# Altium PCB Pill_STM32F405.PcbDoc
Units mm, origin at the board's own origin, x right, y up, seen from the top; angles counter-clockwise.
Board outline 74.93 x 25.4 mm, 2 copper layers (Top, Bottom); 35 components, 63 nets, 202 pads, 140 vias.
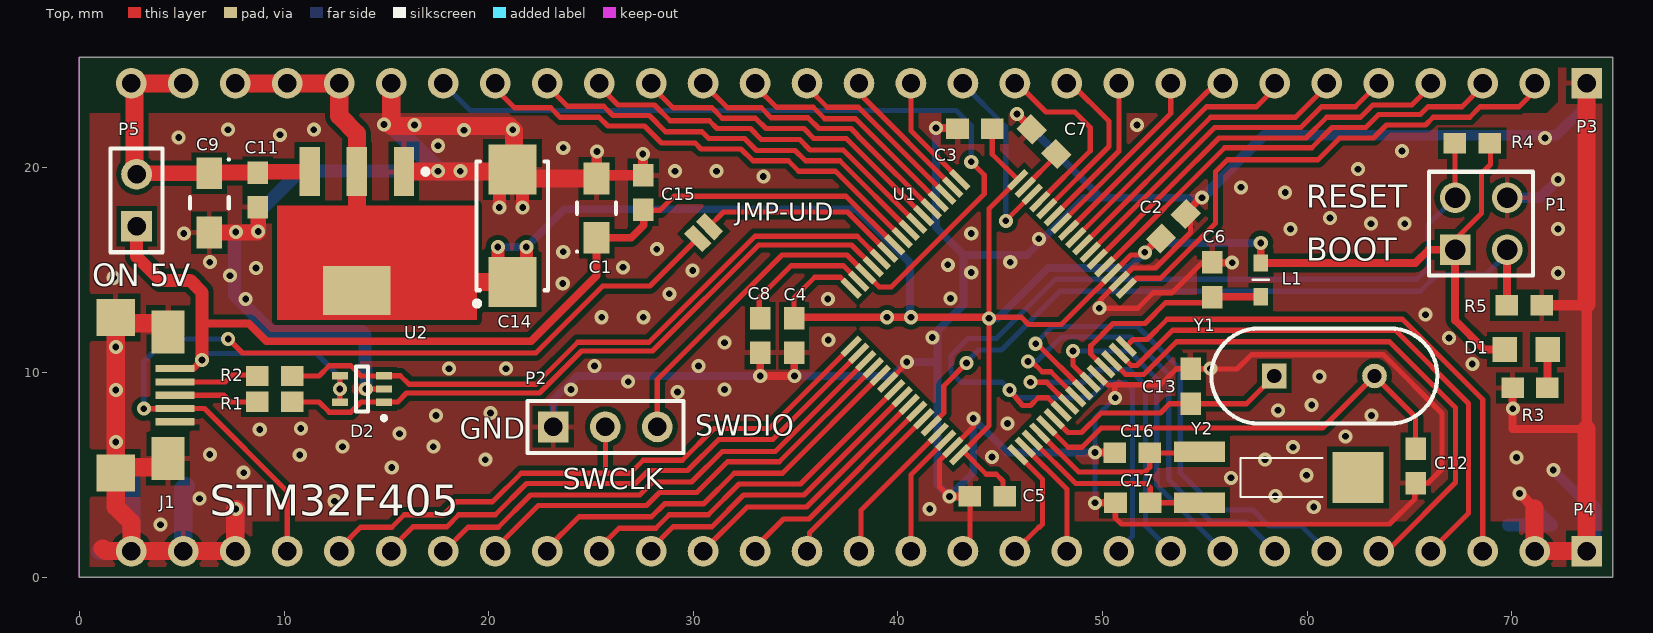
[diagram p0: Top view]
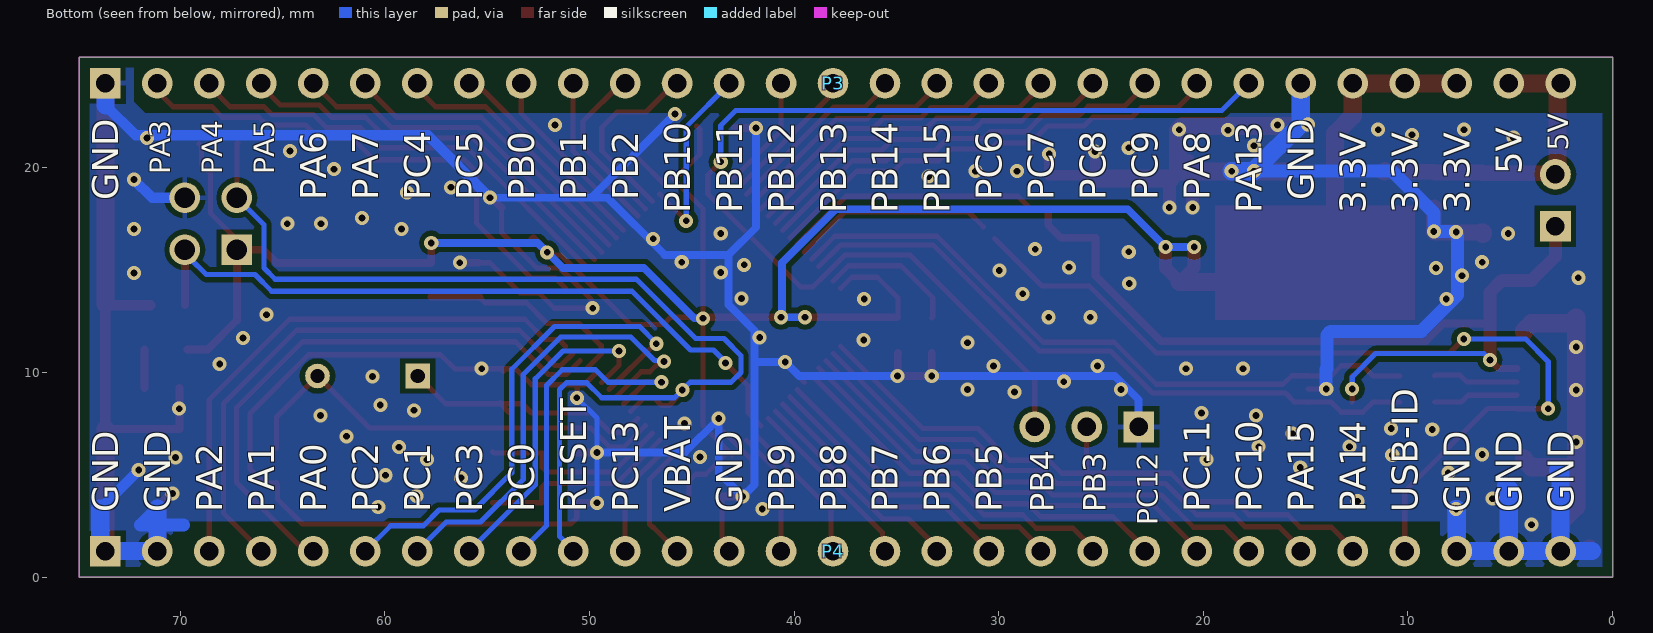
[diagram p1: Bottom view, seen from below]

## Layer stack, top to bottom
Top Solder: solder mask 0.0102, Solder Resist, Dk 3.5
Top: signal copper 0.0356
Dielectric 1: dielectric 0.32, FR-4, Dk 4.8
Bottom: signal copper 0.0356
Bottom Solder: solder mask 0.0102, Solder Resist, Dk 3.5

## Board outline
0,0 74.93,0 74.93,25.4 0,25.4

## Design rules (kind name [scope] priority, off if disabled: settings)
BoardOutlineClearance [All] p1: gap=0.508 ignorepadtopadclearanceinfootprint=FALSE
Clearance Clearance_SFP [InComponentClass('SFP_') vs InComponentClass('SFP_')] p1: gap=0 ignorepadtopadclearanceinfootprint=TRUE
Clearance Clearance_DifferentialPair [InAnyDifferentialPair vs InPolygon] p2: gap=0.254 ignorepadtopadclearanceinfootprint=FALSE except(0: Arc-Hole Track-Hole SMDPad-Hole THPad-Hole Via-Hole Fill-Hole Poly-Hole Region-Hole Text-Hole)
Clearance Clearance_Poly_Poly [InPolygon vs InPolygon] p3: gap=0.635 ignorepadtopadclearanceinfootprint=FALSE
Clearance Clearance_Poly [InPolygon] p4: gap=0.254 ignorepadtopadclearanceinfootprint=FALSE
Clearance Clearance_DP1 [WithinRoom('DP1')] p5: gap=0.254 ignorepadtopadclearanceinfootprint=FALSE except(0: Arc-Hole Track-Hole SMDPad-Hole THPad-Hole Via-Hole Fill-Hole Poly-Hole Region-Hole Text-Hole)
Clearance [All] p6: gap=0.254 ignorepadtopadclearanceinfootprint=TRUE except(0.152: Arc-Via Track-Via SMDPad-Fill SMDPad-Poly SMDPad-Region Via-Via; 0.178: Arc-Arc Arc-Track Arc-SMDPad Arc-THPad Track-Track Track-SMDPad Track-THPad; 0.203: SMDPad-Via Via-Fill Via-Poly Via-Region; 0.229: Via-Hole)
ComponentClearance [All] p1: gap=0 collisioncheckmode=3 verticalgap=0.254 showdistances=FALSE
DiffPairsRouting DiffPairsRouting_DP1 [WithinRoom('DP1')] p1: maxlimit=0.127 minlimit=0.127 mostfreqgap=0.127 toplayer_minwidth=0.102 toplayer_maxwidth=0.102 toplayer_prefwidth=0.102 bottomlayer_minwidth=0.102 bottomlayer_maxwidth=0.102 bottomlayer_prefwidth=0.102 maxuncoupledlength=12.7
DiffPairsRouting [All] p2: maxlimit=0.203 minlimit=0.152 mostfreqgap=0.178 toplayer_minwidth=0.152 toplayer_maxwidth=0.203 toplayer_prefwidth=0.178 bottomlayer_minwidth=0.152 bottomlayer_maxwidth=0.203 bottomlayer_prefwidth=0.178 maxuncoupledlength=12.7
HoleSize [All] p1: absolutevalues=TRUE maxlimit=4.623 minlimit=0.025 maxpercent=80.000 minpercent=20.000
PolygonConnect PolygonConnect_Vias [IsVia] p1: connectstyle=Direct reliefconductorwidth=0.254 reliefentries=4 polygonreliefangle="90 Angle" airgapwidth=0.254
PolygonConnect [All] p2: connectstyle=Relief reliefconductorwidth=0.254 reliefentries=4 polygonreliefangle="90 Angle" airgapwidth=0.254
RoomDefinition Pill_STM32F405 [InComponentClass('Pill_STM32F405')] p1: confinementstyle=ConfineIn formatcopy=TRUE lockcomponents=FALSE outline -48.26,-61.722 2.54,-61.722 2.54,-36.322 -48.26,-36.322
RoutingVias [All] p1: holewidth=0.711 width=1.27 viastyle="Through Hole" minholewidth=0.008 minwidth=0.015 maxholewidth=0.711 maxwidth=1.27
SilkToSilkClearance [All] p1: silktosilkclearance=0.152
SilkToSolderMaskClearance SilkToSolderMaskClearance_0603 [HasFootprint('CAPC0603(1608)100_L')     Or   HasFootprint('RESC0603(1608)_L')] p1: minsilkscreentomaskgap=0.089 clearancetoexposedcopper=TRUE
SilkToSolderMaskClearance [IsPad] p2: minsilkscreentomaskgap=0.127 clearancetoexposedcopper=TRUE
SolderMaskExpansion [All] p1: expansion=0.102
Width Width_DP1 [WithinRoom('DP1')] p1: maxlimit=0.254 minlimit=0.178 preferedwidth=0.178
Width [All] p2: maxlimit=1.397 minlimit=0.178 preferedwidth=0.254
25 further rules are at their usual default settings.

## Components (designator, comment, footprint, x,y, rotation, side; value= is the part's Value field where it differs from the comment)
C1 "10µF" Body_A_M__CAPMP3216X18N 25.273,18.034 r90 top
C2 "100nF" 0603-CAP 53.467,17.145 r225 top
C3 "100nF" 0603-CAP 43.764,21.92 r0 top
C4 "100nF" 0603-CAP 34.925,11.811 r90 top
C5 "100nF" 0603-CAP 44.374,3.962 r0 top
C6 "100nF" 0603-CAP 55.372,14.529 r270 top
C7 "2.2µF" 0603-CAP 47.142,21.285 r315 top
C8 "2.2µF" 0603-CAP 33.274,11.811 r90 top
C9 "10µF" Body_A_M__CAPMP3216X18N 6.35,18.288 r270 top
C11 "100nF" 0603-CAP 8.712,18.923 r90 top
C12 "18pF" 0603-CAP 65.303,5.436 r90 top
C13 "18pF" 0603-CAP 54.305,9.322 r270 top
C14 "100mF" Body_C_L__CAPMP6032X28M 21.158,17.17 r90 top
C15 "100nF" 0603-CAP 27.559,18.796 r270 top
C16 "10pF" 0603-CAP 51.46,6.071 r0 top
C17 "10pF" 0603-CAP 51.486,3.632 r0 top
D1 "LTST-C170KRKT" "LED 0805 RED SMD" 69.587,11.125 r0 top
D2 "PESD5V0L4UW" PESD5V0L4UW 14.825,8.56 r180 top
J1 "Micro USB 2.0 Type AB Receptacle" USB-MICROB-SMD 1.778,8.89 r270 top locked
JMP-UID "SOLDERJUMPERNC" SJ_2S 30.505,16.84 r45 top
L1 "BLM18EG101TN1D" BLM18 57.734,14.529 r270 top
P1 "Header 2X2" HDR2X2 67.234,16.002 r0 top locked
P2 "Header 3" HDR1X3 23.165,7.341 r0 top
P3 "Header 29" HDR1X29 73.66,24.13 r180 bottom locked
P4 "Header 29" HDR1X29 73.66,1.27 r180 bottom locked
P5 "Header 2" HDR1X2 2.794,17.145 r90 top
R1 "22R" 0603-RES 9.55,8.56 r180 top
R2 "22R" 0603-RES 9.55,9.83 r180 top
R3 "470R" 0603-RES 70.891,9.246 r0 top
R4 "10K" 0603-RES 68.072,21.209 r180 top
R5 "10K" 0603-RES 70.612,13.284 r180 top
U1 "STM32F405RGT6" LQFP64 44.45,12.7 r45 top locked
U2 "LD1117S33CTR" MP04A_N 13.564,16.916 r270 top locked
Y1 "HC-49US 8.000MHZ" JPY-HC-49US 60.845,9.83 r0 top locked
Y2 "AB26TRB-32.768KHZ-T" AB26TRB32768KHZT 59.741,4.877 r180 top locked

## Footprints (in the part's own frame and the unit in brackets; to place one, negate y for a bottom-side part, rotate by r counter-clockwise, add the part's x,y. Pads: shape width x height; smd on the part's side, far side on the other; paste and mask are expansions set on the pad)
0603-CAP [mm] "0603-CAP"
  rect 1.1x1 smd: 1(-0.85,0) 2(0.85,0)
  body extent -1.23,-0.4 1.23,0.4, height 0.8
0603-RES [mm] "0603-RES"
  rect 1.1x1 smd: 1(-0.85,0) 2(0.85,0)
  body extent -0.8,-0.41 0.8,0.41, height 0.51
AB26TRB32768KHZT [mm]
  rect 2.5x1 smd: 1(5,-1.25) 2(5,1.25)
  rect 2.5x2.5 smd: 3(-2.75,0)
  silkscreen extent -1,-0.95 3,0.95, body extent -3.07,-1.53 5.91,1.53, height 2
BLM18 [mm] "FERRITE BEAD 0603 1LN"
  rect 0.85x0.7 smd: 1(-0.825,0) 2(0.825,0)
  silkscreen extent 0,-0.38 0,0.38, body extent -0.8,-0.4 0.8,0.4, height 0.65
Body_A_M__CAPMP3216X18N [mm] "Body_A_M__Molded Capacitor, 2-Leads, Body 3,20x1,60mm, IPC Medium Density"
  rect 1.55x1.25 smd: 1(-1.45,0) 2(1.45,0)
  silkscreen extent -2.17,-0.95 0.28,1, body extent -1.73,-0.8 1.73,0.8, height 1.65
Body_C_L__CAPMP6032X28M [mm] "Body_C_L__Molded Capacitor, 2-Leads, Body 6,00x3,20mm, IPC Low Density"
  rect 2.45x2.35 smd: 1(-2.75,0) 2(2.75,0)
  silkscreen extent -3.92,-1.75 3.15,1.85, body extent -3.09,-1.58 3.09,1.63, height 2.68
HDR1X2 [mm] "Connector; Header; 2 Position"
  rect 1.5x1.5 hole 0.9: 1(0,0)
  round 1.5 hole 0.9: 2(2.54,0)
  silkscreen extent -1.27,-1.27 3.81,1.27, body extent -1.27,-1.24 3.81,1.25, height 8.54
HDR1X3 [mm] "Connector; Header; 3 Position"
  rect 1.5x1.5 hole 0.9: 1(0,0)
  round 1.5 hole 0.9: 2(2.54,0) 3(5.08,0)
  silkscreen extent -1.27,-1.27 6.35,1.27, body extent -1.27,-1.24 6.35,1.25, height 8.54
HDR1X29 [mm] "Connector; Header; 29 Position"
  rect 1.5x1.5 hole 0.9: 1(0,0)
  round 1.5 hole 0.9: 2(2.54,0) 3(5.08,0) 4(7.62,0) 5(10.16,0) 6(12.7,0) 7(15.24,0) 8(17.78,0) 9(20.32,0) 10(22.86,0) 11(25.4,0) 12(27.94,0) 13(30.48,0) 14(33.02,0) 15(35.56,0) 16(38.1,0) 17(40.64,0) 18(43.18,0) 19(45.72,0) 20(48.26,0) 21(50.8,0) 22(53.34,0) 23(55.88,0) 24(58.42,0) 25(60.96,0) 26(63.5,0) 27(66.04,0) 28(68.58,0) 29(71.12,0)
  body extent -1.27,-1.29 72.39,1.25, height 7.62
HDR2X2 [mm] "Connector; Header; 2x2 Position"
  rect 1.5x1.5 hole 1: 1(0,0)
  round 1.5 hole 1: 2(0,2.54) 3(2.54,0) 4(2.54,2.54)
  silkscreen extent -1.27,-1.27 3.81,3.81, body extent -1.22,-1.27 3.78,3.81, height 8.54
JPY-HC-49US [mm] "THD, 2-Leads, Body 11.05x4.65mm, Pitch 4.9mm"
  rect 1.2x1.2 hole 0.7: 1(-2.45,0)
  round 1.2 hole 0.7: 2(2.45,0)
  silkscreen extent -5.53,-2.32 5.53,2.32, body extent -5.53,-2.33 5.52,2.32, height 3.5
"LED 0805 RED SMD" [mm]
  rect 1.2x1.2 smd: 1(0.068,0) 2(2.168,0)
  body extent 0.11,-0.62 2.13,0.63, height 1.1
LQFP64 [mm] "LQFP64"
  rect 0.3x1.2 smd: 1(-3.75,-5.75) 2(-3.25,-5.75) 3(-2.75,-5.75) 4(-2.25,-5.75) 5(-1.75,-5.75) 6(-1.25,-5.75) 7(-0.75,-5.75) 8(-0.25,-5.75) 9(0.25,-5.75) 10(0.75,-5.75) 11(1.25,-5.75) 12(1.75,-5.75) 13(2.25,-5.75) 14(2.75,-5.75) 15(3.25,-5.75) 16(3.75,-5.75) 33(3.75,5.75) 34(3.25,5.75) 35(2.75,5.75) 36(2.25,5.75) 37(1.75,5.75) 38(1.25,5.75) 39(0.75,5.75) 40(0.25,5.75) 41(-0.25,5.75) 42(-0.75,5.75) 43(-1.25,5.75) 44(-1.75,5.75) 45(-2.25,5.75) 46(-2.75,5.75) 47(-3.25,5.75) 48(-3.75,5.75)
  rect 1.2x0.3 smd: 17(5.75,-3.75) 18(5.75,-3.25) 19(5.75,-2.75) 20(5.75,-2.25) 21(5.75,-1.75) 22(5.75,-1.25) 23(5.75,-0.75) 24(5.75,-0.25) 25(5.75,0.25) 26(5.75,0.75) 27(5.75,1.25) 28(5.75,1.75) 29(5.75,2.25) 30(5.75,2.75) 31(5.75,3.25) 32(5.75,3.75) 49(-5.75,3.75) 50(-5.75,3.25) 51(-5.75,2.75) 52(-5.75,2.25) 53(-5.75,1.75) 54(-5.75,1.25) 55(-5.75,0.75) 56(-5.75,0.25) 57(-5.75,-0.25) 58(-5.75,-0.75) 59(-5.75,-1.25) 60(-5.75,-1.75) 61(-5.75,-2.25) 62(-5.75,-2.75) 63(-5.75,-3.25) 64(-5.75,-3.75)
  body extent -6.01,-6.01 6.01,6.01, height 1.45
MP04A_N [mm] "SOT223, 4-Leads, Body 6.5x3.5mm, Pitch 2.3mm, Lead Span 7mm, IPC Medium Density"
  rect 2.4x1 smd: 1(-2.9,2.3) 2(-2.9,0) 3(-2.9,-2.3)
  rect 2.4x3.3 smd: 4(2.9,0)
  silkscreen extent -3.02,3.23 -2.78,3.48
PESD5V0L4UW [mm]
  rect 0.8x0.356 smd: 1(-0.059,0.015) 2(-0.059,-0.635) 3(-0.059,-1.285) 4(2.091,-1.285) 5(2.091,0.015)
  silkscreen extent -0.14,-1.73 1.32,0.87, body extent 0.34,-1.73 1.69,0.47, height 1.1
SJ_2S [mm] "SJ_2S"
  rect 0.635x1.27 smd: 1(-0.412,0) 2(0.412,0)
USB-MICROB-SMD [mm] "USB-MICROB-SMD"
  rect 0.35x1.9 smd: 1(-1.3,2.9) 2(-0.65,2.9) 3(0,2.9) 4(0.65,2.9) 5(1.3,2.9)
  rect 1.8x1.9 smd paste+0: S1(-3.8,0) S4(3.8,0)
  rect 2.1x1.6 smd paste+0: S1(-3.1,2.55) S4(3.1,2.55)
  body extent -4,-2.75 4,3.15, height 2.69

## Part data
C1 C9: library part "Capacitor Polarized", "10µF Molded Tantalum Capacitors 6.3V 1206 (3216 Metric) 4Ohm @ 100kHz", Manufacturer="AVX Corporation", Manufacturer PN=TAJA106M006SNJ, Tolerance=5%, Voltage - Rated=6.3V, URL Digi-Key=https://www.digikey.com/en/products/detail/avx-corporation/TAJA106M006SNJ/11201726
C2 C3 C4 C5 C6 C11 C15: library part Capacitor_0603_100nF, "Capacitor 0603 100nF 50V", Manufacturer="TDK Corporation", Manufacturer PN=CGA3E2X7R1H104K080AA, Operating Temperature="-55°C ~ 125°C", Temperature Coefficient=X7R, Tolerance=±10%, Voltage - Rated=50V, Features=Automotive, URL Digi-Key=https://www.digikey.com/product-detail/en/tdk-corporation/CGA3E2X7R1H104K080AA/445-5666-1-ND/2443706
C7 C8: library part Capacitor_0603_2.2µF, "Capacitor 0603 2.2µF 6.3V", Manufacturer="TDK Corporation", Manufacturer PN=CGA3E1X7R0J225K080AC, Operating Temperature="-55°C ~ 125°C", Temperature Coefficient=X7R, Tolerance=±10%, Voltage - Rated=6.3V, Features=Automotive, URL Digi-Key=https://www.digikey.com/en/products/detail/tdk-corporation/CGA3E1X7R0J225K080AC/2672826?s=N4IgTCBcDaIMIHECCBmAogRgBoHYBKGaYYArANIAMAHBUnCALoC%2BQA
C12 C13: library part Capacitor_0603_18pF, "Capacitor 0603 18pF 100V", Manufacturer="TDK Corporation", Manufacturer PN=CGA3E2C0G2A180J080AA, Operating Temperature="-55°C ~ 125°C", Temperature Coefficient="C0G, NP0", Tolerance=±5%, Voltage - Rated=100V, Features=Automotive, URL Digi-Key=https://www.digikey.com/product-detail/en/tdk-corporation/CGA3E2C0G2A180J080AA/445-12321-1-ND/3953987
C14: library part "Capacitor Polarized", "100µF Molded Tantalum Capacitors 6.3V 2312 (6032 Metric) 900mOhm", Manufacturer="AVX Corporation", Manufacturer PN=TAJC107K006SNJ, Tolerance=5%, Voltage - Rated=6.3V, URL Digi-Key=https://www.digikey.com/en/products/detail/avx-corporation/TAJC107K006SNJ/11266696
C16 C17: library part Capacitor_0603_10pF, "Capacitor 0603 10pF 100V", Manufacturer="TDK Corporation", Manufacturer PN=CGA3E2C0G2A100D080AA, Operating Temperature="-55°C ~ 125°C", Temperature Coefficient="C0G, NP0", Tolerance=±0.5%, Voltage - Rated=100V, Features=Automotive, URL Digi-Key=https://www.digikey.com/product-detail/en/tdk-corporation/CGA3E2C0G2A100D080AA/445-12318-1-ND/3953984
D1: library part "LED 0805 RED SMD", "LED RED  0805 SMD", Manufacturer="Lite-On Inc.", Manufacturer PN=LTST-C170KRKT, URL Digi-Key=https://www.digikey.com/product-detail/en/lite-on-inc/LTST-C170KRKT/160-1415-1-ND/386778
D2: "TVS DIODE 5V 13V 5TSSOP", Manufacturer="Nexperia USA Inc.", Manufacturer PN=PESD5V0L4UG,115, URL Digi-Key=https://www.digikey.com/product-detail/en/nexperia-usa-inc/PESD5V0L4UG115/1727-3835-6-ND/1530880
J1: library part KLS1-233-1-0-0-R, "USB - micro B USB 2.0 Receptacle Connector 5 Position Surface Mount, Right Angle; Through Hole", Manufacturer="KLS electronic co ltd", Manufacturer PN=L-KLS1-233-0-0-0-R, Operating Temperature="-30°C ~ 80°C", Rated Current=1.8A, Working Voltage=100VAC, ComponentLink1Description=Manufacturer, ComponentLink1URL=http://www.we-online.de, ComponentLink2Description=Datasheet, ComponentLink2URL=https://katalog.we-online.com/em/datasheet/629105150921.pdf, Mounting Technology=SMT, Pin Number=5, Type=Horizontal
JMP-UID: "Solder JumperStandard SMD solder jumper. Used to automate production. Two varients : Normally Open and Normally Closed are the same, but have different paste layers. NC will have a large amount of paste and should jumper during reflow.", DeviceName=NC, DeviceSetName=SOLDERJUMPER, GateName_1=1, LibraryName=stm32f4stamp, SymbolName_1=SJ
L1: "100 Ohms @ 100MHz 1  Ferrite Bead 0603 (1608 Metric) 2A 45mOhm", Manufacturer="Murata Electronics North America", Operating Temperature="-55°C ~ 125°C", Features="100mOhm 2A", Manufacturer PN=BLM18EG101TN1D, URL Digi-Key=https://www.digikey.com/product-detail/en/murata-electronics-north-america/BLM18EG101TN1D/490-5978-1-ND/3845178
P1: "CONN HEADER VERT 4POS 2.54MM", Manufacturer="Sullins Connector Solutions", Manufacturer PN=PRPC002DAAN-RC, URL Digi-Key=https://www.digikey.com/product-detail/en/sullins-connector-solutions/PRPC002DAAN-RC/S2011EC-02-ND/2775292
P2: "Header, 3-Pin 2.54mm", Manufacturer="Samtec Inc.", Manufacturer PN=TSW-103-07-F-S, URL Digi-Key=https://www.digikey.com/product-detail/en/samtec-inc/TSW-103-07-F-S/SAM8995-ND/2685877
P3 P4: "CONN HEADER VERT 29POS 2.54MM", Manufacturer="Sullins Connector Solutions", Manufacturer PN=PRPC029SAAN-RC, URL Digi-Key=https://www.digikey.com/en/products/detail/sullins-connector-solutions/PRPC029SAAN-RC/2775225
P5: "Header, 2-Pin 2.54mm", Manufacturer="Samtec Inc.", Manufacturer PN=TSW-102-07-F-S, URL Digi-Key=https://www.digikey.com/product-detail/en/samtec-inc/TSW-102-07-F-S/SAM10844-ND/2685866
R1 R2: library part R_0603_22R_5%, "Resistors 0603 5%", Manufacturer="Panasonic Electronic Components", Manufacturer PN=ERJ-3GEYJ220V, Power (Watts)="0.1W, 1/10W", Temperature Coefficient=±200ppm/°C, Tolerance=5%, Features="Automotive AEC-Q200", URL Digi-Key=https://www.digikey.com/product-detail/en/panasonic-electronic-components/ERJ-3GEYJ220V/P22GCT-ND/134662
R3: library part R_0603_470R_5%, "Resistors 0603 5%", Manufacturer="Panasonic Electronic Components", Manufacturer PN=ERJ-3GEYJ471V, Power (Watts)="0.1W, 1/10W", Temperature Coefficient=±200ppm/°C, Tolerance=5%, Features="Automotive AEC-Q200", URL Digi-Key=https://www.digikey.com/product-detail/en/panasonic-electronic-components/ERJ-3GEYJ471V/P470GCT-ND/134802
R4 R5: library part R_0603_10K_5%, "Resistors 0603 5%", Manufacturer="Panasonic Electronic Components", Manufacturer PN=ERJ-3GEYJ103V, Power (Watts)="0.1W, 1/10W", Temperature Coefficient=±200ppm/°C, Tolerance=5%, Features="Automotive AEC-Q200", URL Digi-Key=https://www.digikey.com/product-detail/en/panasonic-electronic-components/ERJ-3GEYJ103V/P10KGCT-ND/134717
U1: "ARM Cortex-M4 32-bit MCU+FPU, 1024 KB Flash, 192 KB Internal RAM, 51 I/Os, 64-Pin LQFP, -40 to 85 degC, Tape and Reel", I/Os (High Current)=51, Manufacturer=STMicroelectronics, Operating Frequency(F) (Processor speed) (MHz)=168, Package Description=LQFP64, Package Reference="64-Pin Low-profile Quad Flat Package, Body 10 x 10 mm, Pitch 0.5 mm", Supply Voltage(Vcc) min (V)=1.8, ComponentLink1Description="Manufacturer URL", ComponentLink1URL=http://www.st.com/, ComponentLink2Description=Datasheet, ComponentLink2URL=http://www.st.com/st-web-ui/static/active/en/resource/technical/document/datasheet/DM00037051.pdf, Core="ARM Cortex-M4", D/A Converter=2, DatasheetVersion="Rev. 6", FLASH Size (Prog) (kB)=1024, Internal RAM Size (kB)=192, Manufacturer PN=STM32F405RGT6, Mounting Technology="Surface Mount", Packing="Tape and Reel", URL Digi-Key=https://www.digikey.com/product-detail/en/stmicroelectronics/STM32F405RGT6/497-11767-ND/2754208
U2: library part CMP-0062-01639-2, "IC REG LINEAR 3.3V 800MA SOT223", Manufacturer=STMicroelectronics, ComponentLink1Description="LM1117 Datasheet", ComponentLink1URL=http://www.national.com/ds/LM/LM1117.pdf, ComponentLink2Description="LM1117 Web Page", ComponentLink2URL=http://www.national.com/pf/LM/LM1117.html, ComponentLink3Description="MP04A Package Page", ComponentLink3URL=http://www.national.com/packaging/folders/mp04a.html, Manufacturer PN=LD1117S33CTR, URL Digi-Key=https://www.digikey.com/product-detail/en/stmicroelectronics/LD1117S33CTR/497-1241-1-ND/586241
Y1: library part CMP-2100-03645-1_1, "Crystal, 8 MHz,   -55°C ~ 125°C", Manufacturer="ECS Inc.", Manufacturer PN=ECS-080-20-4X-DU, Package Description="2-Pin Throug Hole Device, Body 11.05 x 4.65 mm, Pitch 4.9 mm", Package Reference=HC-49US, Datasheet URL=https://statics3.seeedstudio.com/images/opl/datasheet/306010014.pdf, Datasheet Version=42125.0, URL Digi-Key=https://www.digikey.com/products/en/crystals-oscillators-resonators/crystals/171?k=&pkeyword=&pv252=25&FV=1140050%2Cffe000ab%2Cmu8MHz%7C2150&quantity=0&ColumnSort=0&page=1&stock=1&pageSize=25
Y2: "32.768kHz ±20ppm Crystal 12.5pF 50 kOhms Cylindrical Can, Radial", Capacitance=12.5pF, Manufacturer=ABRACON, Operating Temperature="-40°C ~ 85°C", Tolerance=±20ppm, Manufacturer PN=AB26TRB-32.768KHZ-T, URL Digi-Key=https://www.digikey.com/en/products/detail/abracon-llc/AB26TRB-32-768KHZ-T/675228?s=N4IgTCBcDaIIICEwDYAqAlBBaAzGAdAOzIAcA0gBIBaWqABCALoC%2BQA

## Via types
v1: diameter 0.686/0.686 (per signal layer), hole 0.33, Top to Bottom, tented both sides, 140 vias

## Nets (pads, with @x,y where several pads share a name; then routed paths per layer and width w, separated by ;. In a path a pad name is that pad's centre, name@x,y a point inside that pad or via, vN(x,y) a via of type N, cw(c..) or ccw(c..) an arc to the next point about the centre after c; other vN are vias at no path point)
BOOT0: P1.3 R5.2 U1.60 | length 35.7
  Top w0.254: U1.60 42.24,8.015 42.24,9.347 v1(43.358,10.465)
  Top w0.381: R5.2 69.774,13.296 P1.3
  Bottom w0.254: v1(43.358,10.465) 43.358,10.516 43.942,11.1 45.06,11.1 47.93,13.97 65.532,13.97 66.345,14.783 68.732,14.783 69.52,15.571 69.52,16.18 P1.3@69.748,16.18
GND: C1.2 C2.1 C3.1 C4.1 C5.1 C6.1 C7.1 C8.1 C9.2 C11.1 C12.1 C13.1 C14.2 C15.1 C16.1 C17.1 D2.2 J1.5 J1.S1 J1.S4 P1.4 P2.1 P3.1 P3.24 P4.1 P4.2 P4.13 P4.27 P4.28 P4.29 R3.1 R5.1 U1.12 U1.18 U1.54 U1.63 U2.1 | length 328.2
  Top w0.254: v1(13.995,9.195) D2.2 ; C14.2@20.523,19.285 21.054,19.816 C14.2 21.595,19.484 C14.2@21.666,19.412 ; U1.54 40.437,10.454 v1(40.437,10.516) ; v1(42.52,3.937) 42.037,4.42 42.037,5.691 43.688,7.342 ; C3.1@42.889,21.946 C3.1 ; P4.13 43.18,1.607 43.524,1.951 C5.1 C5.1@43.499,3.937 ; C7.1 C7.1@46.541,21.912 ; U1.12 49.786,9.872 50.268,9.39 50.551,9.39 50.559,9.398 52.823,9.398 53.61,10.185 v1(55.27,10.185) ; C16.1@50.585,6.096 C16.1 ; 50.597,9.373 50.597,8.763 v1(50.622,8.763) ; C17.1 50.495,3.632 50.622,3.505 50.622,2.896 50.927,2.591 64.033,2.591 65.246,3.803 65.246,4.528 C12.1 65.303,4.636 65.342,4.597 65.913,4.597 66.599,5.283 66.599,8.001 63.729,10.871 57.277,10.871 56.577,10.172 C13.1 C13.1@54.196,10.063 ; C2.1@54.305,18.059 54.305,16.84 52.578,15.113 51.459,15.113 50.814,14.468 49.927,13.581 49.927,13.224 v1(49.847,13.144) 51.727,13.144 52.476,13.894 53.391,13.894 54.864,15.367 55.337,15.367 55.372,15.332 C6.1 C6.1@55.384,15.367 ; v1@54.788,18.542 v1(54.864,18.542)
  Top w0.381: C8.1 v1(33.274,9.83) v1(34.95,9.83) 34.933,9.847 34.933,10.953 C4.1 ; v1(41.859,21.946) C3.1@42.889,21.946 ; v1(42.52,3.937) C5.1@43.499,3.937 ; v1(45.822,22.631) C7.1@46.541,21.912 ; v1(49.632,3.632) C17.1@50.495,3.632 ; v1(49.632,6.096) C16.1@50.585,6.096 ; C2.1@54.305,18.059 v1@54.788,18.542 ; C6.1@55.384,15.367 v1(56.337,15.367) ; R3.1 70.042,7.239 73.66,7.239
  Top w0.406: v1@20.523,17.932 v1(20.523,18.059)
  Top w0.508: C1.2 C1.2@25.286,19.497 ; v1(25.298,20.803) 25.286,20.79 C1.2@25.286,19.497 ; v1(27.534,20.676) 27.546,20.663 27.546,19.659 C15.1 25.435,19.646 C1.2@25.286,19.497 ; v1(70.383,4.089) 71.12,3.353 ; R5.1 73.584,13.284 73.66,13.36 73.66,7.437
  Top w0.635: v1(20.523,18.059) C14.2@20.523,19.285 ; C14.2@20.725,20.353 C14.2 ; v1(21.666,18.059) C14.2@21.666,19.412
  Top w0.762: C9.2@6.423,16.84 8.712,16.84 8.738,16.866 v1(8.738,16.891) 8.738,18.048 C11.1
  Top w0.889: 1.143,1.397 1.27,1.27 P4.29 ; J1.S4@4.328,5.79 4.328,5.73 3.972,5.374 2.062,5.374 J1.S4@1.778,5.09 ; J1.S1@4.328,11.99 4.328,12.05 3.972,12.406 2.062,12.406 1.778,12.69 v1(1.778,11.252) v1(1.778,9.144) v1(1.778,6.604) J1.S4@1.778,5.09 ; C9.2 6.35,16.767 C9.2@6.423,16.84 ; v1(7.645,3.327) 7.62,3.302 P4.27 P4.28 P4.29 ; P3.24 15.24,22.073 15.265,22.047 21.006,22.047 v1(21.184,21.869) 21.234,21.819 21.234,19.997 C14.2 ; U2.1 C14.2@21.054,19.816 ; C14.2@21.595,19.484 C1.2 ; 71.12,3.353 P4.2 P4.1 73.66,7.239 ; 73.66,13.36 P3.1 ; J1.S4@1.778,5.09 1.778,3.429 2.54,2.667 P4.29
  Bottom w0.254: v1(49.632,3.632) v1(49.632,6.096) 49.632,7.772 v1(50.622,8.763)
  Bottom w0.381: P2.1 23.165,8.661 24.333,9.83 25.171,9.83 v1(33.274,9.83) ; v1(34.95,9.83) 39.751,9.83 v1(40.437,10.516) 41.935,10.516 ; v1(41.859,21.946) 41.859,17.094 43.205,15.748 ; v1(45.822,22.631) 49.911,18.542 ; v1(49.632,6.096) 45.339,6.096 v1(43.688,7.747) 43.688,5.105 v1(42.52,3.937) 41.935,4.521 41.935,10.516 ; v1(54.864,18.542) 49.911,18.542 ; 41.935,10.516 41.935,12.04 43.205,13.31 43.205,15.748 ; 43.205,15.748 46.33,15.748 49.124,18.542 49.911,18.542
  Bottom w0.508: v1(54.864,18.542) 57.912,21.59 72.187,21.59 73.66,23.063 ; P1.4 71.374,18.542 v1(72.263,19.431) ; v1(72.034,5.232) 73.914,3.353
  Bottom w0.635: v1(7.645,16.866) v1@7.659,16.866 ; v1(13.995,9.195) 13.995,10.16 13.97,10.185 13.97,11.836 13.792,12.014 9.347,12.014 7.569,13.792 7.569,16.776 v1@7.659,16.866 ; v1(17.526,19.837) 10.77,19.837 8.738,17.805 v1(8.738,16.891) 7.685,16.891 v1@7.659,16.866 ; 69.85,2.54 71.12,2.54 71.933,2.54 71.12,3.353
  Bottom w0.889: 1.016,1.27 P4.29 ; 2.667,5.207 2.54,5.08 P4.29 ; 5.207,4.445 5.08,4.318 P4.28 ; v1(7.645,3.327) 7.62,3.302 P4.27 P4.28 ; P3.24 15.24,22.149 v1@17.526,19.863 ; v1(17.526,19.837) v1(18.618,19.837) ; 71.12,3.353 71.12,2.54 P4.2 P4.1 73.914,1.524 73.914,3.353 ; 73.66,23.063 P3.1 ; P4.29 P4.28
  other v1: 3.962,2.565 41.554,3.327 60.325,3.429 12.471,3.708 5.867,3.835 58.445,3.962 56.286,4.851 59.969,4.978 8.026,5.105 15.265,5.359 19.837,5.74 57.937,5.74 70.231,5.842 44.602,5.867 10.77,5.969 6.375,5.994 59.309,6.35 12.852,6.375 17.297,6.375 61.874,6.883 15.646,7.01 8.814,7.214 10.82,7.264 45.354,7.504 17.424,7.899 63.144,7.899 20.091,8.026 58.572,8.153 70.053,8.23 60.223,8.407 29.235,9.042 24.028,9.169 31.521,9.169 26.822,9.55 60.604,9.804 18.059,10.185 20.853,10.185 25.171,10.312 30.251,10.312 68.072,10.414 31.521,11.455 36.601,11.582 66.929,11.684 41.681,11.709 25.527,12.7 27.559,12.7 65.786,12.827 8.128,13.589 36.576,13.589 42.57,13.614 28.829,13.843 23.622,14.351 1.676,14.63 7.366,14.732 72.263,14.859 43.586,14.884 29.972,14.986 8.636,15.113 26.568,15.138 42.443,15.265 6.375,15.392 45.491,15.392 23.647,15.9 28.219,16.027 46.888,16.535 5.105,16.789 43.586,16.789 59.182,17.018 72.263,17.018 63.119,17.272 64.77,17.272 61.112,17.551 58.928,18.796 56.769,19.05 33.426,19.583 29.108,19.837 31.14,19.837 62.484,19.939 64.643,20.828 23.647,20.98 17.526,21.082 71.628,21.463 4.851,21.488 9.804,21.615 18.796,21.844 7.264,21.869 11.455,21.869 16.383,22.098 51.689,22.098 14.884,22.123
NetC7_2: C7.2 U1.31 | length 2.3
  Top w0.254: U1.31 47.743,20.589 C7.2
NetC8_2: C8.2 U1.47 | length 6.8
  Top w0.254: C8.2 33.223,12.712 33.223,13.665 34.773,15.215 37.339,15.215 U1.47
NetD1_2: D1.2 R3.2 | length 1.9
  Top w0.381: R3.2 71.741,11.111 D1.2
NetJ1_2: J1.2 R2.2 | length 4.2
  Top w0.254: J1.2 7.112,9.54 ; 7.127,9.54 7.468,9.881 8.65,9.881 R2.2
NetJ1_3: J1.3 R1.2 | length 4.2
  Top w0.254: J1.3 7.061,8.89 7.391,8.56 R1.2
OSC32_IN: C17.2 U1.3 Y2.2 | length 9.9
  Top w0.254: U1.3 48.689,4.572 52.146,4.572 52.336,4.383 C17.2 54.735,3.632 Y2.2
OSC32_OUT: C16.2 U1.4 Y2.1 | length 9.4
  Top w0.254: U1.4 48.837,5.131 52.07,5.131 52.31,5.371 C16.2 54.685,6.071 Y2.1
OSC_IN: C12.2 U1.5 Y1.2 | length 22.3
  Top w0.254: U1.5 48.325,6.35 48.997,6.35 49.936,7.29 60.755,7.29 Y1.2 65.303,7.821 C12.2
OSC_OUT: C13.2 U1.6 Y1.1 | length 12.9
  Top w0.254: U1.6 48.321,7.061 48.971,7.061 49.936,8.026 52.832,8.026 53.278,8.472 C13.2 C13.2@54.355,8.472 ; C13.2@53.932,8.049 C13.2@54.355,8.472 ; C13.2@54.356,8.473 C13.2@54.356,8.534 ; Y1.1 57.037,8.472 C13.2@54.355,8.472
PA0: P4.5 U1.14 | length 27.9
  Top w0.254: U1.14 51.133,9.906 52.019,9.906 53.619,11.506 64.033,11.506 67.259,8.28 67.259,4.623 64.145,1.508 63.738,1.508 P4.5
PA1: P4.4 U1.15 | length 27.5
  Top w0.254: U1.15 51.408,10.338 51.689,10.338 53.416,12.065 64.313,12.065 67.894,8.484 67.894,3.124 P4.4
PA2: P4.3 U1.16 | length 27
  Top w0.254: U1.16 51.49,11.608 52.172,11.608 53.162,12.598 64.668,12.598 68.58,8.687 P4.3
PA3: P3.2 U1.17 | length 25.8
  Top w0.254: U1.17 51.658,14.605 52.832,14.605 55.524,17.297 55.524,19.812 56.109,20.396 60.528,20.396 61.595,21.463 63.246,21.463 63.881,22.098 65.786,22.098 66.167,22.479 67.945,22.479 68.453,22.987 70.358,22.987 71.12,23.749 P3.2
PA4: P3.3 U1.20 | length 22.3
  Top w0.254: U1.20 50.171,15.175 55.976,20.98 60.223,20.98 61.214,21.971 62.865,21.971 63.5,22.606 65.532,22.606 65.913,22.987 67.564,22.987 68.58,24.003 P3.3
PA5: P3.4 U1.21 | length 19.9
  Top w0.254: U1.21 53.402,19.177 55.688,21.463 59.944,21.463 60.96,22.479 62.611,22.479 63.207,23.075 65.112,23.075 66.04,24.003 P3.4
PA6: P3.5 U1.22 | length 17.5
  Top w0.254: U1.22 55.489,21.971 59.69,21.971 60.706,22.987 62.357,22.987 P3.5
PA7: P3.6 U1.23 | length 15.3
  Top w0.254: U1.23 55.29,22.479 59.436,22.479 60.96,24.003 P3.6
PA8: P3.22 U1.41 | length 23.2
  Top w0.254: P3.22 20.32,23.876 21.26,22.936 23.038,22.936 23.495,22.479 25.4,22.479 25.832,22.047 27.61,22.047 28.448,21.209 30.099,21.209 30.378,20.93 32.334,20.93 32.918,20.345 34.646,20.345 35.154,19.837 36.959,19.837 U1.41
PA10: JMP-UID.2 U1.43 | length 9.9
  Top w0.254: JMP-UID.2@30.759,17.12 31.483,17.843 37.539,17.843 U1.43
PA13: P2.3 P3.23 U1.46 | length 53.6
  Top w0.254: P2.3 28.245,9.652 34.341,15.748 37.513,15.748 U1.46 39.088,14.173 39.675,14.173 44.221,18.72 44.221,19.66 v1(43.586,20.295)
  Bottom w0.254: P3.23 19.101,22.809 42.85,22.809 43.586,22.073 v1(43.586,20.295)
PA14: P2.2 P4.25 U1.49 | length 31.8
  Top w0.254: P4.25 12.827,1.143 12.827,1.524 13.741,2.438 15.265,2.438 15.875,3.048 17.78,3.048 18.415,3.683 20.193,3.683 21.59,5.08 25.679,5.08 ; P2.2 25.705,5.105 25.679,5.08 ; U1.49 33.711,7.264 31.013,7.264 29.464,5.715 27.559,5.715 26.924,5.08 25.679,5.08
PA15: P4.24 U1.50 | length 26.9
  Top w0.254: P4.24@15.265,1.245 15.265,1.422 16.307,2.464 17.958,2.464 18.542,3.048 20.32,3.048 21.844,4.572 27.178,4.572 27.813,5.207 29.718,5.207 31.242,6.731 33.885,6.731 U1.50
PB0: P3.9 U1.26 | length 9.1
  Top w0.254: U1.26 53.34,22.651 P3.9
PB1: P3.10 U1.27 | length 7.8
  Top w0.254: U1.27 50.8,20.818 P3.10
PB2: P3.11 U1.28 | length 8.4
  Top w0.254: U1.28 50.317,21.042 50.317,22.276 48.463,24.13 P3.11
PB3: P4.20 U1.55 | length 17.8
  Top w0.254: P4.20 25.4,1.422 26.365,2.388 28.169,2.388 28.829,3.048 30.734,3.048 32.233,4.547 35.236,4.547 U1.55
PB4: P4.19 U1.56 | length 15.7
  Top w0.254: P4.19 28.067,1.143 28.067,1.524 29.007,2.464 30.912,2.464 32.461,4.013 35.41,4.013 U1.56
PB5: P4.18 U1.57 | length 13.2
  Top w0.254: P4.18 30.556,1.194 30.556,1.346 32.639,3.429 35.532,3.429 U1.57
PB6: P4.17 U1.58 | length 10.8
  Top w0.254: P4.17 33.02,1.448 34.417,2.845 35.656,2.845 U1.58
PB7: P4.16 U1.59 | length 8.8
  Top w0.254: P4.16 35.687,1.397 35.687,2.169 U1.59
PB8: P4.15 U1.61 | length 7.6
  Top w0.254: P4.15 38.329,1.27 38.202,1.397 38.202,3.27 U1.61
PB9: P4.14 U1.62 | length 6.1
  Top w0.254: P4.14 40.64,5.001 U1.62
PB10: P3.12 U1.29 | length 9.2
  Top w0.254: P3.12 45.847,24.13 47.244,22.733 48.641,22.733 49.403,21.971 49.403,20.835 U1.29
PB11: P3.13 U1.30 | length 9.4
  Top w0.254: v1(45.276,17.414) U1.30
  Bottom w0.254: P3.13@43.18,24.105 45.276,22.009 v1(45.276,17.414)
PB12: P3.14 U1.33 | length 6.2
  Top w0.254: P3.14 40.64,21.813 U1.33
  Top w0.406: P3.14@40.259,24.13 P3.14@40.616,23.773
PB13: P3.15 U1.34 | length 7
  Top w0.254: P3.15 38.338,23.892 38.338,23.408 U1.34@42.682,19.064
PB14: P3.16 U1.35 | length 9.1
  Top w0.254: P3.16 35.56,23.952 36.551,22.962 38.077,22.962 U1.35
PB15: P3.17 U1.36 | length 11.4
  Top w0.254: P3.17 33.045,24.105 33.045,23.978 34.061,22.962 35.865,22.962 36.424,22.403 37.929,22.403 U1.36
PC0: P4.9 U1.8 | length 17.1
  Top w0.254: v1(46.482,9.525) 47.271,9.525 U1.8
  Bottom w0.254: v1(46.482,9.525) 49.098,9.525 49.708,10.135 51.333,10.135 52.095,9.373 52.095,2.515 P4.9
PC1: P4.7 U1.9 | length 23.3
  Top w0.254: v1(46.355,10.541) 46.545,10.541 47.053,10.033 47.471,10.033 U1.9
  Bottom w0.254: v1(46.355,10.541) 46.397,10.583 46.829,10.583 47.981,11.735 51.41,11.735 53.238,9.906 53.238,4.775 55.321,2.692 56.998,2.692 P4.7 P4.7@58.42,1.626
PC2: P4.6 U1.10 | length 25.3
  Top w0.254: v1(46.736,11.405) 46.806,11.405 U1.10
  Bottom w0.254: v1(46.736,11.405) 46.736,11.43 47.549,12.243 51.714,12.243 53.797,10.16 53.797,5.105 55.626,3.277 57.353,3.277 58.115,2.515 59.715,2.515 P4.6
PC3: P4.8 U1.11 | length 16.3
  Top w0.254: v1(48.565,11.049) 48.565,10.353 U1.11
  Bottom w0.254: v1(48.565,11.049) 51.295,11.049 52.654,9.69 52.654,4.496 P4.8
PC4: P3.7 U1.24 | length 13
  Top w0.254: U1.24 55.091,22.987 57.531,22.987 58.42,23.876 P3.7
PC5: P3.8 U1.25 | length 10.5
  Top w0.254: U1.25 55.157,23.761 55.174,23.761 55.543,24.13 P3.8
PC6: P3.18 U1.37 | length 13.7
  Top w0.254: P3.18 31.674,22.936 33.325,22.936 33.807,22.454 35.611,22.454 36.144,21.92 37.705,21.92 38.352,21.273 U1.37
PC7: P3.19 U1.38 | length 16.1
  Top w0.254: P3.19 27.94,24.003 29.007,22.936 30.912,22.936 31.42,22.428 33.045,22.428 33.553,21.92 35.408,21.92 35.89,21.438 37.48,21.438 U1.38
PC8: P3.20 U1.39 | length 18.4
  Top w0.254: P3.20 25.4,24.003 26.328,23.075 28.106,23.075 28.88,22.301 30.785,22.301 31.166,21.92 32.791,21.92 33.325,21.387 35.204,21.387 35.712,20.879 37.332,20.879 U1.39
PC9: P3.21 U1.40 | length 21.1
  Top w0.254: P3.21@22.86,23.876 P3.21 22.885,24.155 22.885,23.978 23.851,23.012 25.629,23.012 26.086,22.555 27.864,22.555 28.651,21.768 30.429,21.768 30.759,21.438 32.512,21.438 33.096,20.853 34.976,20.853 35.484,20.345 37.158,20.345 U1.40
PC10: P4.23 U1.51 | length 24.7
  Top w0.254: P4.23@17.78,1.219 18.999,2.438 20.472,2.438 22.047,4.013 27.381,4.013 28.016,4.648 29.921,4.648 31.42,6.147 34.008,6.147 U1.51 ; P4.23 P4.23@17.78,1.483
PC11: P4.22 U1.52 | length 22.3
  Top w0.254: P4.22@20.32,1.219 P4.22 20.32,1.397 22.428,3.505 27.711,3.505 28.346,4.14 30.175,4.14 31.674,5.639 34.207,5.639 U1.52
PC12: P4.21 U1.53 | length 19.9
  Top w0.254: P4.21 22.86,1.397 24.409,2.946 27.965,2.946 28.6,3.581 30.505,3.581 32.004,5.08 34.355,5.08 U1.53
PC13: P4.11 U1.2 | length 5.9
  Top w0.254: U1.2 48.26,4.294 P4.11
RESET: P1.2 P4.10 R4.2 U1.7 | length 53.9
  Top w0.254: v1(45.466,9.144) 46.101,8.382 46.482,8.382 46.863,8.763 47.326,8.763 U1.7 ; R4.2 67.183,21.209 67.234,21.158 P1.2
  Bottom w0.254: P4.10 50.8,1.338 51.46,1.999 51.46,9.169 51.13,9.5 50.14,9.5 49.403,8.763 45.847,8.763 v1(45.466,9.144) 45.085,9.525 43.078,9.525 42.596,10.008 42.596,10.82 43.434,11.659 44.806,11.659 47.701,14.554 65.354,14.554 65.913,15.113 65.913,17.221 P1.2
USB-ID: J1.4 JMP-UID.1 P4.26 | length 44
  Top w0.254: v1(3.15,8.23) 4.668,8.23 J1.4 6.111,8.24 10.16,4.191 P4.26 ; v1(7.274,11.633) 7.29,11.633 7.976,10.947 18.004,10.947 22.301,10.947 25.578,14.224 27.889,14.224 JMP-UID.1
  Bottom w0.254: v1(3.15,8.23) 3.15,10.541 4.242,11.633 v1(7.274,11.633)
USB_DM: D2.3 R2.1 U1.44 | length 32.8
  Top w0.254: R2.1 11.711,9.83 12.208,10.327 13.261,10.327 13.758,9.83 14.869,9.83 D2.3 15.682,9.845 16.104,9.423 22.301,9.423 24.359,11.481 27.837,11.481 33.019,16.662 38.013,16.662 U1.44
USB_DP: D2.1 R1.1 U1.45 | length 32.4
  Top w0.254: R1.1 11.711,8.56 12.208,8.062 13.261,8.062 13.758,8.56 D2.1@14.869,8.56 ; D2.1 D2.1@14.869,8.56 ; U1.45 37.738,16.231 33.198,16.231 28.016,11.049 24.537,11.049 22.48,8.992 15.987,8.992 15.555,8.56 D2.1@14.869,8.56
VBAT: P4.12 U1.1 | length 5.8
  Top w0.254: P4.12 46.888,2.438 46.917,2.438 47.066,2.587 47.066,4.78 U1.1
VBus: C1.1 C15.2 D2.4 D2.5 J1.1 P5.1 U1.42 | length 59
  Top w0.254: D2.5 12.725,8.554 v1(12.725,9.195) 12.725,9.836 D2.4 ; C15.2@27.584,17.932 28.372,17.932 29.056,18.617 37.472,18.617 U1.42
  Top w0.33: J1.1 5.567,10.19 v1(5.994,10.617)
  Top w0.381: 5.944,10.998 5.994,10.998 ; 5.994,12.395 8.28,12.395 9.144,11.532 17.786,11.532 22.073,11.532 25.273,14.732 C1.1@25.273,16.51 ; C1.1 26.973,16.584 27.584,17.196 C15.2@27.584,17.932
  Top w0.635: P5.1 2.794,15.672 3.962,14.503 5.41,14.503 5.994,13.919 5.994,12.395 5.994,10.998 v1(5.994,10.617)
  Bottom w0.254: v1(5.994,10.617) 6.299,10.922 11.582,10.922 12.725,9.779 v1(12.725,9.195)
VCC3.3V: C2.2 C3.2 C4.2 C5.2 C14.1 D1.1 L1.1 P1.1 P3.25 P3.26 P3.27 R4.1 U1.19 U1.32 U1.48 U1.64 U2.2 U2.4 | length 138.2
  Top w0.254: C4.2@34.964,12.7 C4.2 34.925,13.64 35.941,14.656 37.18,14.656 37.722,14.114 U1.48 ; U1.64 43.187,6.133 43.219,6.133 44.323,5.029 44.806,5.029 45.14,4.695 45.14,4.046 C5.2 ; U1.64@43.127,6.073 44.45,7.397 v1(44.45,12.649) v1@44.45,12.7 ; C3.2 44.614,20.668 U1.32 45.752,19.305 U1.32@45.719,19.305 ; C3.2@44.741,22.047 C3.2@44.756,22.032 ; U1.32@46.164,19.718 44.45,18.003 v1@44.45,12.7 ; v1(52.07,15.875) 51.943,15.748 51.387,15.748 47.985,12.346 46.391,12.346 46.038,12.7 v1@44.45,12.7 ; C2.2@52.739,16.544 C2.2 ; P1.1@67.208,16.18 67.208,16.459 68.529,17.78 68.529,19.736 68.961,20.168 68.961,21.057 R4.1@69.088,21.184
  Top w0.381: C4.2@34.964,12.7 v1(39.472,12.7) v1(40.64,12.7) v1@44.45,12.7 ; v1(52.07,15.875) C2.2@52.739,16.544 ; v1(57.734,16.332) L1.1 65.29,15.354 65.938,16.002 P1.1 67.234,12.548 68.656,11.125 D1.1
  Top w0.635: v1(20.447,16.129) 20.447,15.132 C14.1 21.844,15.106 v1(21.844,16.129)
  Top w0.889: P3.27 P3.26 P3.25 12.7,22.53 13.564,21.666 U2.2 13.564,17.628 ; U2.4 13.564,17.628 ; C14.1 18.93,14.42 15.723,17.628 13.564,17.628
  Bottom w0.381: v1(20.447,16.129) v1(21.844,16.129) 23.698,17.983 37.973,17.983 40.589,15.367 40.589,12.751 v1(40.64,12.7) ; v1(39.472,12.7) v1@39.522,12.7 ; v1@39.573,12.649 v1@39.522,12.7 ; v1@40.691,12.649 v1(40.64,12.7) ; v1@44.475,12.649 44.882,12.649 47.346,15.113 51.308,15.113 v1(52.07,15.875) 52.527,16.332 v1(57.734,16.332) ; v1@39.522,12.7 v1(40.64,12.7)
VCC3.3VDA: C6.2 L1.2 U1.13 | length 10.7
  Top w0.254: U1.13 49.428,10.903 49.428,11.303 50.521,12.395 52.07,12.395 53.086,13.411 55.104,13.411 C6.2
  Top w0.381: C6.2 55.397,13.704 L1.2
VCC5V: C9.1 C11.2 P3.28 P3.29 P5.2 U2.3 | length 15.8
  Top w0.762: P5.2 2.847,19.738 C9.1 6.385,19.773 C11.2 8.756,19.816 U2.3@11.213,19.816 ; U2.3@11.124,19.905 U2.3@11.213,19.816 ; U2.3@11.166,19.77 U2.3@11.199,19.802 ; U2.3@11.227,19.802 U2.3@11.199,19.802 ; U2.3 U2.3@11.213,19.816 ; U2.3@11.199,19.802 U2.3@11.213,19.816
  Top w0.889: P5.2@2.847,19.738 2.847,19.797 2.692,19.952 2.692,23.978 P3.29 P3.28
pads on no net: Y2.3

## Polygon pours and split planes (outlines as drawn)
GND on Bottom "Polygon_1_Net_GND" (solid, remove dead copper, pour order 0): -0.127,22.669 4.498,22.669 71.702,22.669 72.263,23.23 72.263,25.527 75.057,25.527 75.057,-0.127 70.358,-0.127 70.358,2.731 8.433,2.73 8.433,-0.127 -0.127,-0.127
GND on Top "Polygon_2_Net_GND" (solid, remove dead copper, pour order 2): -0.127,22.669 4.498,22.669 71.702,22.669 72.263,23.23 72.263,25.527 75.057,25.527 75.057,-0.127 70.358,-0.127 70.358,2.731 8.458,2.73 8.458,-0.127 -0.127,-0.127

## Keep-outs
Keep-Out Layer:
  the board outline again, w0

## Other copper
Top:
  rectangle net VCC3.3V: 9.652,12.573 19.431,18.161

## Silkscreen, mask and mechanical layers (free items; w line width, h text height)
Top Overlay:
  text "RESET" at 59.969,18.059 h1.12
  text "BOOT" at 59.969,15.469 h1.12
  text "ON 5V" at 0.635,14.224 h1.1
  text "SWDIO" at 30.099,6.909 h1.02
  text "GND" at 18.593,6.756 h1.02
  text "SWCLK" at 23.622,4.293 h1.02
  text "STM32F405" at 6.375,2.997 h1.52
Bottom Overlay:
  text "5V" at 2.159,20.828 h1 r270
  text "5V" at 4.445,19.685 h1.27 r270
  text "PA5" at 65.405,19.685 h1 r270
  text "PA4" at 67.945,19.685 h1 r270
  text "PA3" at 70.485,19.685 h1 r270
  text "GND" at 14.605,18.415 h1.27 r270
  text "PA8" at 19.685,18.415 h1.27 r270
  text "PC9" at 22.225,18.415 h1.27 r270
  text "PC8" at 24.765,18.415 h1.27 r270
  text "PC7" at 27.305,18.415 h1.27 r270
  text "PC6" at 29.845,18.415 h1.27 r270
  text "PB2" at 47.625,18.415 h1.27 r270
  text "PB1" at 50.165,18.415 h1.27 r270
  text "PB0" at 52.705,18.415 h1.27 r270
  text "PC5" at 55.245,18.415 h1.27 r270
  text "PC4" at 57.785,18.415 h1.27 r270
  text "PA7" at 60.325,18.415 h1.27 r270
  text "PA6" at 62.865,18.415 h1.27 r270
  text "GND" at 73.025,18.415 h1.27 r270
  text "3.3V" at 6.985,17.78 h1.27 r270
  text "3.3V" at 9.525,17.78 h1.27 r270
  text "3.3V" at 12.065,17.78 h1.27 r270
  text "PA13" at 17.145,17.78 h1.27 r270
  text "PB15" at 32.385,17.78 h1.27 r270
  text "PB14" at 34.925,17.78 h1.27 r270
  text "PB13" at 37.465,17.78 h1.27 r270
  text "PB12" at 40.005,17.78 h1.27 r270
  text "PB11" at 42.545,17.78 h1.27 r270
  text "PB10" at 45.085,17.78 h1.27 r270
  text "GND" at 1.905,3.175 h1.27 r270
  text "GND" at 4.445,3.175 h1.27 r270
  text "GND" at 6.985,3.175 h1.27 r270
  text "USB-ID" at 9.525,3.175 h1.27 r270
  text "PA14" at 12.065,3.175 h1.27 r270
  text "PA15" at 14.605,3.175 h1.27 r270
  text "PC10" at 17.145,3.175 h1.27 r270
  text "PC11" at 19.685,3.175 h1.27 r270
  text "PB3" at 24.765,3.175 h1.1 r270
  text "PB4" at 27.305,3.175 h1.15 r270
  text "PB5" at 29.845,3.175 h1.27 r270
  text "PB6" at 32.385,3.175 h1.27 r270
  text "PB7" at 34.925,3.175 h1.27 r270
  text "PB8" at 37.465,3.175 h1.27 r270
  text "PB9" at 40.005,3.175 h1.27 r270
  text "GND" at 42.545,3.175 h1.27 r270
  text "VBAT" at 45.085,3.175 h1.27 r270
  text "PC13" at 47.625,3.175 h1.27 r270
  text "RESET" at 50.165,3.175 h1.27 r270
  text "PC0" at 52.705,3.175 h1.27 r270
  text "PC3" at 55.245,3.175 h1.27 r270
  text "PC1" at 57.785,3.175 h1.27 r270
  text "PC2" at 60.325,3.175 h1.27 r270
  text "PA0" at 62.865,3.175 h1.27 r270
  text "PA1" at 65.405,3.175 h1.27 r270
  text "PA2" at 67.945,3.175 h1.27 r270
  text "GND" at 70.485,3.175 h1.27 r270
  text "GND" at 73.025,3.175 h1.27 r270
  text "PC12" at 22.225,2.54 h1 r270
Board:
  the board outline again, w0.152
Dimensions:
  the board outline again, w0
Top3D:
  lines w0.203: 43.18,0 43.18,25.4
  lines w0.406: -3.81,11.43 -2.54,11.43 ; -3.81,13.97 -2.54,13.97 ; -2.54,1.27 -1.27,1.27 ; -2.54,3.81 -1.27,3.81 ; -2.54,6.35 -1.27,6.35 ; -2.54,8.89 -1.27,8.89 ; -2.54,16.51 -1.27,16.51 ; -2.54,19.05 -1.27,19.05 ; -2.54,21.59 -1.27,21.59 ; -2.54,24.13 -1.27,24.13
BotCourtyard:
  lines w0: 39.147,12.7 40.64,12.7 ; 39.89,24.13 40.195,23.749 ; 49.847,13.144 49.935,13.462
Mechanical 29:
  region: 2.73,18.224 2.73,22.352 4.889,22.352 4.889,18.224
  text "Frank Zhao" at 20.955,6.667 h1.26
  text "20131027" at 20.955,5.651 h1.26